# EAGLE board M_3x4._v6 (EAGLE 9.6.2)
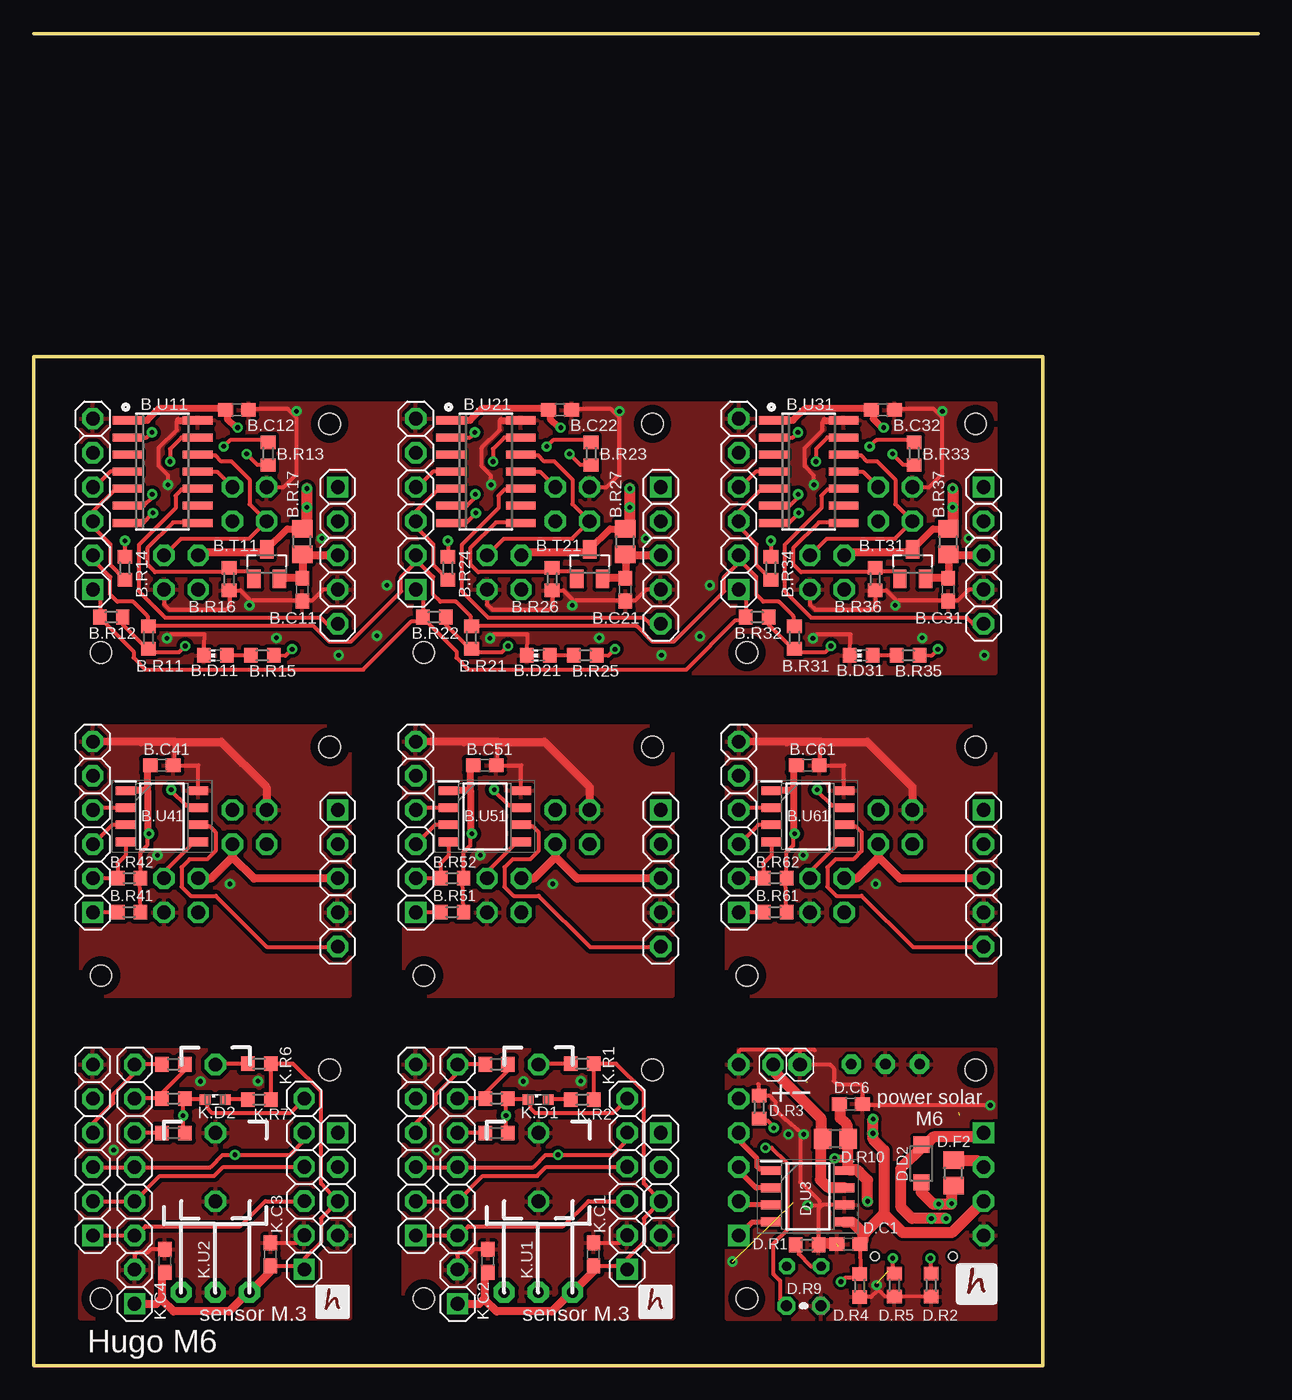
[diagram p0: board, top side]
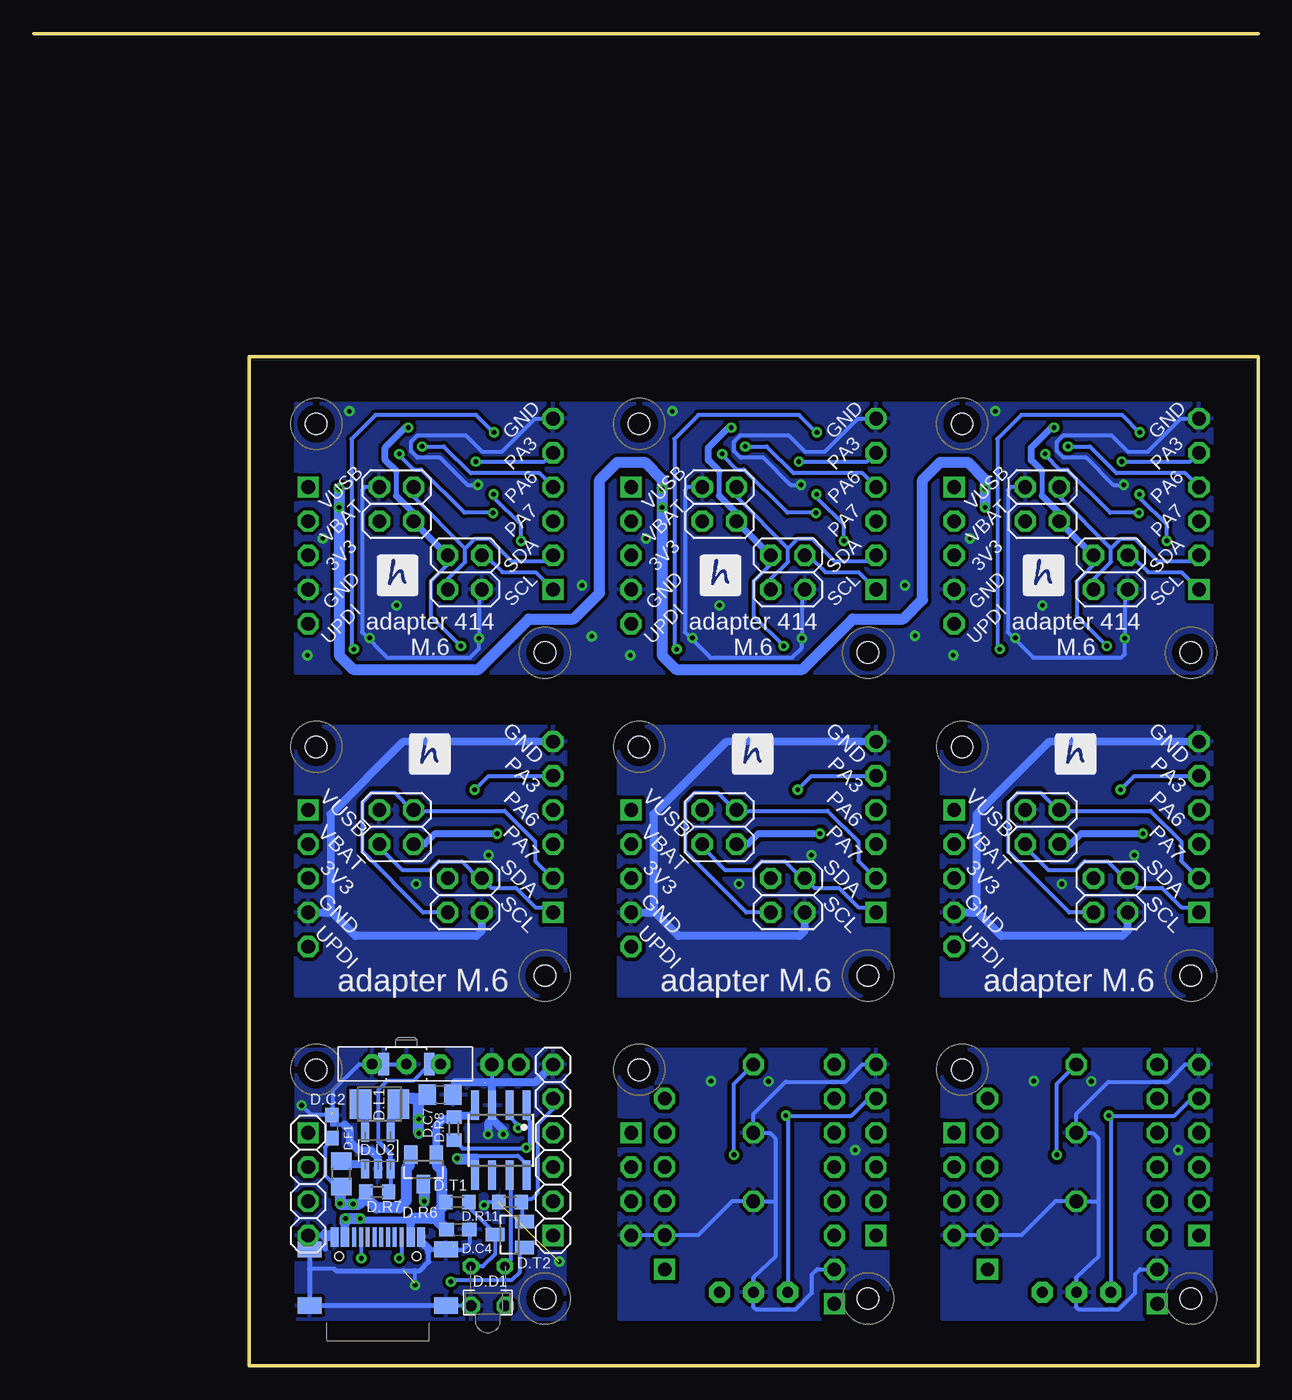
[diagram p1: board, bottom side, seen from below]

Size 91 x 99 mm. Coordinates in mm from the lower left corner, seen from the top.
Outline: 91,99 0,99
Outline: 0,0 75,0 75,75 0,75 0,0
Copper layers (1*16): Top 0.035mm / dielectric 1.5mm / Bottom 0.035mm
Design rules "default *": minimum track width 10mil, minimum drill 0.35mm, track to track 6mil, track to pad 6mil, pad to pad 6mil, via to via 6mil, smd to smd 6mil, copper to edge 0mil, drill to drill 15mil, minimum pad ring 10mil, minimum via ring 8mil, stop-mask expansion 4mil, vias tented up to drill 14mil, thermal gap 10mil
Holes 1.6 mm at 5,53 22,70 29,53 46,70 53,53 70,70 22,22 5,5 46,22 29,5 5,29 22,46 29,29 46,46 53,29 70,46 53,5 70,22
tRestrict: area 21,69 to 23,71; area 4,52 to 6,54; area 45,69 to 47,71; area 28,52 to 30,54; area 69,69 to 71,71; area 52,52 to 54,54; area 21,21 to 23,23; area 4,4 to 6,6; area 45,21 to 47,23; area 28,4 to 30,6; area 21,45 to 23,47; area 4,28 to 6,30; 6 more areas
bRestrict: area 21,69 to 23,71; area 4,52 to 6,54; area 45,69 to 47,71; area 28,52 to 30,54; area 69,69 to 71,71; area 52,52 to 54,54; area 4,4 to 6,6; area 21,21 to 23,23; area 28,4 to 30,6; area 45,21 to 47,23; area 21,45 to 23,47; area 4,28 to 6,30; 6 more areas

## Footprints (pad centres in the part's own frame; a part is rotated, then mirrored left to right if it is on the bottom)
C0603 = smd 1.1 x 1: 1 -0.85,0; 2 0.85,0
CHIP-LED0603 = smd 1.1 x 1: A1 0,-0.85; C1 0,0.85
1X05 = drill 1.016 pad 1.575 square: 1 -5.08,0 | drill 1.016 pad 1.575 octagon: 2 -2.54,0; 3 0,0; 4 2.54,0; 5 5.08,0
1X06 = drill 1.016 pad 1.575 square: 1 -6.35,0 | drill 1.016 pad 1.575 octagon: 2 -3.81,0; 3 -1.27,0; 4 1.27,0; 5 3.81,0; 6 6.35,0
2X02 = drill 1.016 pad 1.575 octagon: 1 -1.27,-1.27; 2 -1.27,1.27; 3 1.27,-1.27; 4 1.27,1.27
R0603 = smd 1 x 1.1: 1 -0.85,0; 2 0.85,0
FUSE = smd 1.3 x 1.5: 1 -0.95,0; 2 0.95,0
SO23 = smd 1 x 1.4: D 0,1.1; G -0.95,-1.1; S 0.95,-1.1
SO14 = smd 0.6 x 2.2: 1 -3.81,-2.6; 2 -2.54,-2.6; 3 -1.27,-2.6; 4 0,-2.6; 5 1.27,-2.6; 6 2.54,-2.6; 7 3.81,-2.6; 8 3.81,2.6; 9 2.54,2.6; 10 1.27,2.6; 11 0,2.6; 12 -1.27,2.6; 13 -2.54,2.6; 14 -3.81,2.6
SOIC127P600X175-8N = smd 1.5 x 0.65: 1 -2.7,1.905; 2 -2.7,0.635; 3 -2.7,-0.635; 4 -2.7,-1.905; 5 2.7,-1.905; 6 2.7,-0.635; 7 2.7,0.635; 8 2.7,1.905
C0805 = smd 1.3 x 1.5: 1 -0.95,0; 2 0.95,0
LED_1.8 = drill 0.7 octagon: 1 -1.27,-0.4; 2 1.27,-0.4
SHOTKY_2.8 = smd 1.2 x 1.2: A -1.4,0; K 1.4,0
R0805 = smd 1.3 x 1.5: 1 -0.95,0; 2 0.95,0
1X04 = drill 1.016 pad 1.575 square: 1 -3.81,0 | drill 1.016 pad 1.575 octagon: 2 -1.27,0; 3 1.27,0; 4 3.81,0
L3230M = smd 1.6 x 2.2: 1 -1.4,0; 2 1.4,0
1X02-2 = drill 1.016 pad 1.676 octagon: 1 -1,0 | drill 1.016 pad 1.575 octagon: 2 1,0
SWITCH = drill 0.8 pad 1.422 octagon: P$1 -2.54,0; P$2 0,0; P$3 2.54,0 | smd 0.8 x 1.7: P$4 -1.7,0; P$5 1.7,0
THERM = drill 0.813 octagon: 1 -1.27,0; 2 1.27,0
SOT32-5 = smd 0.6 x 1.4: BP 0.95,1.35; GND 0,-1.35; SHDN 0.95,-1.35; VIN -0.95,-1.35; VOUT -0.95,1.35
SOIC127P600X175-8N' = smd 1.528 x 0.65: 1 -2.711,1.905; 2 -2.711,0.635; 3 -2.711,-0.635; 4 -2.711,-1.905; 5 2.711,-1.905; 6 2.711,-0.635; 7 2.711,0.635; 8 2.711,1.905
1X08 = drill 1.016 pad 1.575 square: 1 -8.89,0 | drill 1.016 pad 1.575 octagon: 2 -6.35,0; 3 -3.81,0; 4 -1.27,0; 5 1.27,0; 6 3.81,0; 7 6.35,0; 8 8.89,0
SML0603 = smd 0.8 x 0.8: A 0.75,0; C -0.75,0
IR_RECEIVER = drill 0.8 pad 1.575 octagon: GND 0,0; OUT -2.54,0; VCC 2.54,0
BUTTON-SWITCH = drill 1.016 pad 1.575 octagon: P$1 0,0; P$2 5.08,0; P$3 10.16,0
USB-C = smd 0.6 x 1.45: A1B12 -3.235,3.825; A4B9 -2.46,3.825; B1A12 3.215,3.825; B4A9 2.44,3.825 | smd 0.3 x 1.45: A5 -1.26,3.825; A6 -0.26,3.825; A7 0.24,3.825; A8 1.24,3.825; B5 1.74,3.825; B6 0.74,3.825; B7 -0.76,3.825; B8 -1.76,3.825 | smd 1.8 x 1.2: SH1 -5.08,2.91; SH2 -5.08,-1.27; SH3 5.06,-1.27; SH4 5.06,2.91 | hole 0.65: 2.88,2.38; -2.9,2.38
SOP8 = smd 0.6 x 2.2: 1 -1.905,-2.6; 2 -0.635,-2.6; 3 0.635,-2.6; 4 1.905,-2.6; 5 1.905,2.6; 6 0.635,2.6; 7 -0.635,2.6; 8 -1.905,2.6

## Placement (x,y rotation side)
B.C11  100n  [C0603]  19.97,57.68 270 top
B.C12  100n  [C0603]  15.12,71.04 0 top
B.C21  100n  [C0603]  43.97,57.68 270 top
B.C22  100n  [C0603]  39.12,71.04 0 top
B.C31  100n  [C0603]  67.97,57.68 270 top
B.C32  100n  [C0603]  63.12,71.04 0 top
B.C41  100n  [C0603]  9.53,44.63 0 top
B.C51  100n  [C0603]  33.53,44.63 0 top
B.C61  100n  [C0603]  57.53,44.63 0 top
B.D11  [CHIP-LED0603]  13.5,52.8 90 top
B.D21  [CHIP-LED0603]  37.5,52.8 90 top
B.D31  [CHIP-LED0603]  61.5,52.8 90 top
B.J1  [1X05]  22.6,60.23 270 top
B.J2  [1X06]  4.4,64.04 90 top
B.J3  [2X02]  10.96,58.96 270 bottom
B.J4  [2X02]  16.04,64.04 270 bottom
B.J5  [1X06]  28.4,64.04 90 top
B.J6  [2X02]  34.96,58.96 270 bottom
B.J7  [2X02]  40.04,64.04 270 bottom
B.J8  [1X05]  46.6,60.23 270 top
B.J9  [1X06]  52.4,64.04 90 top
B.J10  [2X02]  58.96,58.96 270 bottom
B.J11  [2X02]  64.04,64.04 270 bottom
B.J12  [1X05]  70.6,60.23 270 top
B.J13  [1X06]  4.4,40.04 90 top
B.J14  [2X02]  16.04,40.04 270 bottom
B.J15  [1X05]  22.6,36.23 270 top
B.J16  [1X06]  28.4,40.04 90 top
B.J17  [2X02]  40.04,40.04 270 bottom
B.J18  [1X05]  46.6,36.23 270 top
B.J19  [1X06]  52.4,40.04 90 top
B.J20  [2X02]  64.04,40.04 270 bottom
B.J21  [1X05]  70.6,36.23 270 top
B.R11  2k2  [R0603]  8.54,54.12 270 top
B.R12  2k2  [R0603]  5.77,55.65 0 top
B.R13  alt RX 0R  [R0603]  17.43,67.79 270 top
B.R14  alt TX 0R  [R0603]  6.78,59.28 90 top
B.R15  1k  [R0603]  17,52.8 0 top
B.R16  100k  [R0603]  14.53,58.47 270 top
B.R17  alt fuse or 0R  [FUSE]  19.97,61.25 90 top
B.R21  2k2  [R0603]  32.54,54.12 270 top
B.R22  2k2  [R0603]  29.77,55.65 0 top
B.R23  alt RX 0R  [R0603]  41.43,67.79 270 top
B.R24  alt TX 0R  [R0603]  30.78,59.28 90 top
B.R25  1k  [R0603]  41,52.8 0 top
B.R26  100k  [R0603]  38.53,58.47 270 top
B.R27  alt fuse or 0R  [FUSE]  43.97,61.25 90 top
B.R31  2k2  [R0603]  56.54,54.12 270 top
B.R32  2k2  [R0603]  53.77,55.65 0 top
B.R33  alt RX 0R  [R0603]  65.43,67.79 270 top
B.R34  alt TX 0R  [R0603]  54.78,59.28 90 top
B.R35  1k  [R0603]  65,52.8 0 top
B.R36  100k  [R0603]  62.53,58.47 270 top
B.R37  alt fuse or 0R  [FUSE]  67.97,61.25 90 top
B.R41  alt 2k2 for master  [R0603]  7.1,33.72 0 top
B.R42  alt 2k2 for master  [R0603]  7.1,36.24 0 top
B.R51  alt 2k2 for master  [R0603]  31.1,33.72 0 top
B.R52  alt 2k2 for master  [R0603]  31.1,36.24 0 top
B.R61  alt 2k2 for master  [R0603]  55.1,33.72 0 top
B.R62  alt 2k2 for master  [R0603]  55.1,36.24 0 top
B.T11  NX3008  [SO23]  17.33,59.59 0 top
B.T21  NX3008  [SO23]  41.33,59.59 0 top
B.T31  NX3008  [SO23]  65.33,59.59 0 top
B.U11  AT414  [SO14]  9.59,66.45 270 top
B.U21  AT414  [SO14]  33.59,66.45 270 top
B.U31  AT414  [SO14]  57.59,66.45 270 top
B.U41  AT412  [SOIC127P600X175-8N]  9.53,40.84 0 top
B.U51  AT412  [SOIC127P600X175-8N]  33.53,40.84 0 top
B.U61  AT412  [SOIC127P600X175-8N]  57.53,40.84 0 top
D.C1  100n  [C0603]  60.55,9.05 0 top
D.C2  4u7  [C0603]  68.83,17.78 270 bottom
D.C4  4u7  [C0603]  59.47,10.13 180 bottom
D.C6  4u7  [C0603]  60.73,19.46 180 top
D.C7  10u  [C0805]  60.79,20.15 180 bottom
D.D1  LED_1.8  [LED_1.8]  57.25,7 180 bottom
D.D2  SHOTKY_2.8  [SHOTKY_2.8]  65.96,15.04 270 top
D.F1  0.5A  [R0805]  68.13,14.26 90 bottom
D.F2  1.1A  [R0805]  68.36,14.33 90 top
D.J2  [1X06]  52.4,16.04 90 bottom
D.J3  [1X04]  70.6,13.5 270 bottom
D.L1  2u2  [L3230M]  65.3,19.46 0 bottom
D.LIPOL  [1X02-2]  55.95,22.39 180 top
D.ON/OFF/RESET  SWITCH  [SWITCH]  63.3,22.42 0 bottom
D.R1  4k7  [R0603]  57.48,8.99 180 top
D.R2  5k1  [R0603]  66.7,6 270 top
D.R3  I=1800/R (10k for 0.2A, 3k3 for 0.55A, 3k9 for 0.46A)  [R0603]  53.91,19.23 270 top
D.R4  100k  [R0603]  61.39,5.97 270 top
D.R5  5k1  [R0603]  63.96,6 270 top
D.R6  3k3  [R0603]  59.51,12.17 180 bottom
D.R7  390k  [R0603]  65.47,12.93 0 bottom
D.R8  10k?  [R0603]  59.76,17.63 90 bottom
D.R9  TERM_10K  [THERM]  57.22,4.46 180 top
D.R10  0.1  [R0805]  59.58,16.87 180 top
D.R11  100k  [R0603]  55.6,12.17 180 bottom
D.T1  FDV304  [SO23]  62.03,14.61 180 bottom
D.T2  NX3008  [SO23]  55.62,9.76 90 bottom
D.U2  LM3671_3.3  [SOT32-5]  65.41,16 0 bottom
D.U3  INA219AIDR  [SOIC127P600X175-8N']  57.53,12.6 0 top
I.J1  [1X04]  22.6,13.5 270 top
I.J3  [1X04]  46.6,13.5 270 top
JB1  [2X02]  34.96,34.96 270 bottom
JB2  [2X02]  58.96,34.96 270 bottom
JB3  [2X02]  10.96,34.96 270 bottom
JP1  [1X06]  44.11,13.52 90 top
JP2  [1X06]  28.4,16.04 90 top
JP3  [1X08]  31.5,13.5 90 top
JP4  [1X06]  4.4,16.04 90 top
JP5  [1X08]  7.5,13.5 90 top
JP6  [1X06]  20.11,13.52 90 top
K.C1  [C0603]  41.61,8.28 90 top
K.C2  [C0603]  33.76,7.8 90 top
K.C3  [C0603]  17.61,8.28 90 top
K.C4  [C0603]  9.76,7.8 90 top
K.D1  [SML0603]  37.5,19.79 0 top
K.D2  [SML0603]  13.5,19.79 0 top
K.R1  100K  [R0603]  40.77,22.46 180 top
K.R2  180R  [R0603]  40.77,19.79 180 top
K.R3  0R  [R0603]  34.4,19.87 180 top
K.R4  0R  [R0603]  34.4,17.3 180 top
K.R5  0R  [R0603]  34.4,22.41 0 top
K.R6  100K  [R0603]  16.77,22.46 180 top
K.R7  180R  [R0603]  16.77,19.79 180 top
K.R8  0R  [R0603]  10.4,19.87 180 top
K.R9  0R  [R0603]  10.4,17.3 180 top
K.R10  0R  [R0603]  10.4,22.41 0 top
K.U1  VS1838B  [IR_RECEIVER]  37.5,5.46 0 top
K.U2  VS1838B  [IR_RECEIVER]  13.5,5.46 0 top
U$1  BUTTON-SWITCH  [BUTTON-SWITCH]  13.52,12.23 90 top
U$2  BUTTON-SWITCH  [BUTTON-SWITCH]  37.52,12.23 90 top
U$3  USB-C  [USB-C]  65.41,5.75 0 bottom
U$4  CN3083  [SOP8]  56.28,16.77 180 bottom

## Library data of the parts
B.C11 B.C12 B.C21 B.C22 B.C31 B.C32 B.C41 B.C51 B.C61 D.C1 D.C2 D.C4 D.C6 D.C7 K.C1-K.C4 = rcl; SPICEPREFIX: C
B.D11 B.D21 B.D31 K.D1 K.D2 = led
B.J1-B.J21 D.J2 D.J3 D.LIPOL I.J1 I.J3 JB1-JB3 JP1-JP6 = pinhead2
B.R11-B.R16 B.R21-B.R26 B.R31-B.R36 B.R41 B.R42 B.R51 B.R52 B.R61 B.R62 D.F1 D.F2 D.R1-D.R8 D.R10 D.R11 K.R1-K.R10 = rcl; SPICEPREFIX: R
B.R17 B.R27 B.R37 B.T11 B.T21 B.T31 D.D1 D.D2 D.ON/OFF/RESET D.R9 D.T1 D.T2 K.U1 K.U2 U$1-U$4 = hugo
B.U11 B.U21 B.U31 = atmel
B.U41 B.U51 B.U61 = ATTINY412-SSN; DESCRIPTION: 8-bit Microcontrollers - MCU 20MHz, 4KB, SOIC8, Ind 105C, Green, Tube; HEIGHT: 1.75mm; MANUFACTURER_NAME: Microchip; MANUFACTURER_PART_NUMBER: ATTINY412-SSN; MOUSER_PART_NUMBER: 579-ATTINY412-SSN; MOUSER_PRICE-STOCK: https://www.mouser.co.uk/ProductDetail/Microchip-Technology/ATTINY412-SSN?qs=3HJ2avRr9PItQG9ZsCamPQ%3D%3D
D.L1 = rcl; SPICEPREFIX: L
D.U2 = !stavebnice03
D.U3 = SamacSys_Parts; DESCRIPTION: 26-V, Bidirectional, Zero-Drift, High-Side, I2C Out Current/Power Monitor; HEIGHT: 1.75mm; MANUFACTURER_NAME: Texas Instruments; MANUFACTURER_PART_NUMBER: INA219AIDR; MOUSER_PART_NUMBER: 595-INA219AIDR; MOUSER_PRICE-STOCK: https://www.mouser.co.uk/ProductDetail/Texas-Instruments/INA219AIDR?qs=XGzIaZb%2FFYIE5YcOHTnKDA%3D%3D

## Nets
3V1: B.C51.1 B.J17.4 B.J18.3 B.R51.2 B.R52.2 B.U51.1 JB1.1
3V2: B.C61.1 B.J20.4 B.J21.3 B.R61.2 B.R62.2 B.U61.1 JB2.1
3V3: B.C41.1 B.J14.4 B.J15.3 B.R41.2 B.R42.2 B.U41.1 JB3.1
GND: B.C11.2 B.C12.2 B.C21.2 B.C22.2 B.C31.2 B.C32.2 B.D11.C1 B.D21.C1 B.D31.C1 B.J1.4 B.J2.6 B.J3.4 B.J4.1 B.J5.6 B.J6.4 B.J7.1 B.J8.4 B.J9.6 B.J10.4 B.J11.1 B.J12.4 B.R16.2 B.R26.2 B.R36.2 B.U11.14 B.U21.14 B.U31.14
GND1: I.J3.4 JP1.2 JP2.6 JP3.2 K.C1.2 K.C2.2 K.U1.GND U$2.P$1 U$2.P$2
GND2: B.C41.2 B.J13.6 B.J14.1 B.J15.4 B.U41.8 JB3.4
GND3: B.C51.2 B.J16.6 B.J17.1 B.J18.4 B.U51.8 JB1.4
GND4: I.J1.4 JP4.6 JP5.2 JP6.2 K.C3.2 K.C4.2 K.U2.GND U$1.P$1 U$1.P$2
GND5: D.C1.1 D.C2.1 D.C4.1 D.C6.1 D.C7.1 D.J2.6 D.J3.4 D.LIPOL.1 D.ON/OFF/RESET.P$1 D.ON/OFF/RESET.P$2 D.ON/OFF/RESET.P$4 D.R1.1 D.R2.2 D.R3.1 D.R4.2 D.R5.2 D.R9.1 D.R11.2 D.U2.GND D.U3.6 U$3.A1B12 U$3.B1A12 U$3.SH1 U$3.SH2 U$3.SH3 U$3.SH4 U$4.3
GND6: B.C61.2 B.J19.6 B.J20.1 B.J21.4 B.U61.8 JB2.4
IN+: D.LIPOL.2 D.R10.2 D.U3.7
IN-: D.C6.2 D.R10.1 D.T1.D D.U3.8 U$4.5 U$4.8
N$1: B.R14.2 B.U11.6
N$2: B.R13.2 B.U11.7
N$3: B.R16.1 B.T11.G B.U11.8
N$4: B.C11.1 B.J1.3 B.R17.1 B.T11.S
N$5: B.R15.2 B.U11.2
N$6: B.R26.1 B.T21.G B.U21.8
N$7: B.C21.1 B.J8.3 B.R27.1 B.T21.S
N$8: B.R25.2 B.U21.2
N$9: B.R24.2 B.U21.6
N$10: B.R23.2 B.U21.7
N$11: B.R36.1 B.T31.G B.U31.8
N$12: B.C31.1 B.J12.3 B.R37.1 B.T31.S
N$13: B.R35.2 B.U31.2
N$14: B.R34.2 B.U31.6
N$15: B.R33.2 B.U31.7
N$16: JP1.4 JP2.2 JP3.4
N$17: JP1.3 JP2.1 JP3.3
N$18: K.D1.A K.R2.2
N$19: JP1.6 JP2.5 K.D1.C K.R3.1 K.R4.1 K.U1.OUT
N$20: JP1.5 JP2.3 JP3.5 K.R1.2 U$2.P$3
N$21: JP2.4 JP3.8 K.R5.1
N$22: JP3.6 K.R4.2
N$24: JP3.7 K.R3.2 K.R5.2
N$25: JP4.2 JP5.4 JP6.4
N$27: JP4.1 JP5.3 JP6.3
N$28: K.D2.A K.R7.2
N$29: JP4.5 JP6.6 K.D2.C K.R8.1 K.R9.1 K.U2.OUT
N$30: JP4.3 JP5.5 JP6.5 K.R6.2 U$1.P$3
N$31: JP4.4 JP5.8 K.R10.1
N$32: JP5.6 K.R9.2
N$33: JP5.7 K.R8.2 K.R10.2
N$34: D.L1.1 D.U2.VOUT
N$35: D.ON/OFF/RESET.P$3 D.ON/OFF/RESET.P$5 D.R7.2 D.U2.SHDN
N$36: D.R5.1 U$3.B5
N$37: D.R2.1 U$3.A5
N$38: D.R3.2 U$4.2
N$39: D.J2.5 D.R11.1 D.T2.S
N$40: D.D1.1 U$4.7
N$41: D.R8.1 D.R9.2 U$4.1
N$42: D.F1.2 D.U2.VIN
PA1: B.D11.A1 B.R15.1
PA2: B.J5.5 B.U21.13
PA3: B.J2.5 B.U11.13
PA4: B.J5.4 B.R23.1 B.U21.4
PA5: B.J5.3 B.R24.1 B.U21.5
PA6: B.J2.4 B.R13.1 B.U11.4
PA7: B.J2.3 B.R14.1 B.U11.5
PA8: B.D21.A1 B.R25.1
PA9: B.J9.5 B.U31.13
PA10: B.J9.4 B.R33.1 B.U31.4
PA11: B.J9.3 B.R34.1 B.U31.5
PA12: B.D31.A1 B.R35.1
PA13: B.J13.5 B.U41.7
PA14: B.J13.4 B.U41.2
PA15: B.J13.3 B.U41.3
PA16: B.J16.5 B.U51.7
PA17: B.J16.4 B.U51.2
PA18: B.J16.3 B.U51.3
PA19: D.J2.4 D.U3.1
PA20: D.J2.3 D.U3.2
PA21: D.D1.2 D.R1.2 D.R6.1 D.T2.D
PA22: B.J19.5 B.U61.7
PA23: B.J19.4 B.U61.2
PA24: B.J19.3 B.U61.3
SCL: B.J2.1 B.J3.2 B.J4.3 B.J5.1 B.J6.2 B.J7.3 B.J9.1 B.J10.2 B.J11.3 B.R12.1 B.R22.1 B.R32.1 B.U11.12 B.U21.12 B.U31.12
SCL1: B.J13.1 B.J14.3 B.R41.1 B.U41.5 JB3.2
SCL2: B.J16.1 B.J17.3 B.R51.1 B.U51.5 JB1.2
SCL3: D.J2.1 D.U3.4
SCL4: B.J19.1 B.J20.3 B.R61.1 B.U61.5 JB2.2
SDA: B.J2.2 B.J3.3 B.J4.2 B.J5.2 B.J6.3 B.J7.2 B.J9.2 B.J10.3 B.J11.2 B.R11.1 B.R21.1 B.R31.1 B.U11.11 B.U21.11 B.U31.11
SDA1: B.J13.2 B.J14.2 B.R42.1 B.U41.4 JB3.3
SDA2: B.J16.2 B.J17.2 B.R52.1 B.U51.4 JB1.3
SDA3: D.J2.2 D.U3.3
SDA4: B.J19.2 B.J20.2 B.R62.1 B.U61.4 JB2.3
UPDI: B.J1.5 B.U11.10
UPDI1: B.J8.5 B.U21.10
UPDI2: B.J12.5 B.U31.10
UPDI3: B.J15.5 B.U41.6
UPDI4: B.J18.5 B.U51.6
UPDI5: B.J21.5 B.U61.6
VBAT: B.J1.2
VBAT1: B.J8.2
VBAT2: B.J12.2
VBATF: D.F2.2 D.J3.2
VCC: B.C12.1 B.C22.1 B.C32.1 B.J3.1 B.J4.4 B.J6.1 B.J7.4 B.J10.1 B.J11.4 B.R11.2 B.R12.2 B.R17.2 B.R21.2 B.R22.2 B.R27.2 B.R31.2 B.R32.2 B.R37.2 B.T11.D B.T21.D B.T31.D B.U11.1 B.U21.1 B.U31.1
VCC1: I.J3.3 JP1.1 JP3.1 K.C1.1 K.C2.1 K.R1.1 K.R2.1 K.U1.VCC
VCC2: I.J1.3 JP5.1 JP6.1 K.C3.1 K.C4.1 K.R6.1 K.R7.1 K.U2.VCC
VCC3: D.C1.2 D.C7.2 D.J3.3 D.L1.2 D.R4.1 D.T2.G D.U2.BP D.U3.5
VMOT: D.C2.2 D.D2.K D.F1.1 D.F2.1 D.R7.1 D.T1.S
VUSB: B.J1.1
VUSB1: B.J8.1
VUSB2: B.J12.1
VUSB3: D.C4.2 D.D2.A D.J3.1 D.R6.2 D.R8.2 D.T1.G U$3.A4B9 U$3.B4A9 U$4.4

## Tracks (layer width: path | path; a pad name or v marks a point on that pad's centre or on a via)
3V1  (via drill 0.35)
  Top 0.305: B.U51.1 32.45,42.75 | B.R51.2 31.88,36.18 B.R52.2 31.94,38.16 32.44,38.66 32.44,39.42 v32.56,39.55 | 38.8,37.83 38.8,38.17 38.77,38.2
  Top 0.508: B.C51.1 32.45,44.4 32.45,42.75 | v32.56,39.55 32.46,39.65 32.46,42.75 B.U51.1
  Top 0.61: B.J18.3 40.39,36.22 38.77,37.84 38.77,38.2 B.J17.4 | JB1.1 37.2,36.23 38.8,37.83
  Bottom 0.508: B.J17.4 37.93,38.77 37.15,39.55 v32.56,39.55
  Bottom 0.61: B.J18.3
3V2  (via drill 0.35)
  Top 0.305: B.U61.1 56.45,42.75 | B.R61.2 55.88,36.18 B.R62.2 55.94,38.16 56.44,38.66 56.44,39.42 v56.56,39.55 | 62.8,37.83 62.8,38.17 62.77,38.2
  Top 0.508: B.C61.1 56.45,44.4 56.45,42.75 | v56.56,39.55 56.46,39.65 56.46,42.75 B.U61.1
  Top 0.61: B.J21.3 64.39,36.22 62.77,37.84 62.77,38.2 B.J20.4 | JB2.1 61.2,36.23 62.8,37.83
  Bottom 0.508: B.J20.4 61.93,38.77 61.15,39.55 v56.56,39.55
  Bottom 0.61: B.J21.3
3V3  (via drill 0.35)
  Top 0.305: B.U41.1 8.45,42.75 | B.R41.2 7.88,36.18 B.R42.2 7.94,38.16 8.44,38.66 8.44,39.42 v8.56,39.55 | 14.8,37.83 14.8,38.17 14.77,38.2
  Top 0.508: B.C41.1 8.45,44.4 8.45,42.75 | v8.56,39.55 8.46,39.65 8.46,42.75 B.U41.1
  Top 0.61: B.J15.3 16.39,36.22 14.77,37.84 14.77,38.2 B.J14.4 | JB3.1 13.2,36.23 14.8,37.83
  Bottom 0.508: B.J14.4 13.93,38.77 13.15,39.55 v8.56,39.55
  Bottom 0.61: B.J15.3
GND  (via drill 0.35)
  Top 0.305: B.J3.4 9.69,56.59 10.09,56.19 14.3,56.19 14.55,56.45 14.55,57.6 B.R16.2 15.37,57.62 16.11,56.88 20.7,56.88 21.51,57.69 B.J1.4 | B.J4.1 18.58,65.31 19.49,66.22 19.49,70.51 18.89,71.12 16.04,71.12 B.C12.2 | v9.91,54.07 10.19,54.35 12.7,54.35 B.D11.C1 | 10.77,70.26 10.63,70.12 10.63,69.55 9.3,68.22 9.3,66.86 9.98,66.18 v9.98,65.48 | B.U11.14 | B.J6.4 33.69,56.59 34.09,56.19 38.3,56.19 38.55,56.45 38.55,57.6 B.R26.2 39.37,57.62 40.11,56.88 44.7,56.88 45.51,57.69 B.J8.4 | B.J7.1 42.58,65.31 43.49,66.22 43.49,70.51 42.89,71.12 40.04,71.12 B.C22.2 | v33.91,54.07 34.19,54.35 36.7,54.35 B.D21.C1 | 34.77,70.26 34.63,70.12 34.63,69.55 33.3,68.22 33.3,66.86 33.98,66.18 v33.98,65.48 | B.U21.14 | B.J10.4 57.69,56.59 58.09,56.19 62.3,56.19 62.55,56.45 62.55,57.6 B.R36.2 63.37,57.62 64.11,56.88 68.69,56.88 69.51,57.69 B.J12.4 | B.J11.1 66.58,65.31 67.49,66.22 67.49,70.51 66.89,71.12 64.04,71.12 B.C32.2 | v57.91,54.07 58.19,54.35 60.7,54.35 B.D31.C1 | 58.77,70.26 58.63,70.12 58.63,69.55 57.3,68.22 57.3,66.86 57.98,66.18 v57.98,65.48 | B.U31.14
  Top 0.508: 10.77,70.26 B.U11.14 | 34.77,70.26 B.U21.14 | 58.77,70.26 B.U31.14
  Bottom 0.305: B.J4.1 18.38,65.31 18.61,65.08 18.61,54.52 16.72,52.63 10.18,52.63 9.91,52.89 v9.91,54.07 9.91,57.47 B.J3.4 | B.J2.6 5.73,70.39 8.2,67.92 9.68,67.92 10.91,69.16 14.47,69.16 14.96,68.67 14.96,67.98 14.47,67.49 12.78,67.49 10.76,65.46 10,65.46 v9.98,65.48 | B.J7.1 42.38,65.31 42.6,65.08 42.6,54.52 40.72,52.63 34.63,52.63 33.91,53.35 v33.91,54.07 33.91,57.47 B.J6.4 | B.J5.6 29.73,70.39 32.2,67.92 33.68,67.92 34.91,69.16 38.47,69.16 38.96,68.67 38.96,67.98 38.47,67.49 36.78,67.49 34.76,65.46 34,65.46 v33.98,65.48 | B.J11.1 66.38,65.31 66.61,65.08 66.61,54.52 64.72,52.63 58.58,52.63 57.91,53.3 v57.91,54.07 57.91,57.47 B.J10.4 | B.J9.6 53.73,70.39 56.2,67.92 57.68,67.92 58.91,69.16 62.47,69.16 62.96,68.67 62.96,67.98 62.47,67.49 60.78,67.49 58.76,65.46 58,65.46 v57.98,65.48
  other vias: 19.54,70.94 16.03,56.51 18.04,54.1 22.66,52.8 21.41,61.49 43.54,70.94 40.03,56.51 42.04,54.1 46.66,52.8 45.5,61.49 67.54,70.94 64.03,56.51 66.04,54.1 70.66,52.8 69.5,61.49 26.25,58 50.25,58 49.52,54.22 25.5,54.25
  pour Bottom (isolate 0.254): 3.5,71.5 3.5,51.5 71.5,51.5 71.5,71.5
  pour Top (isolate 0.254): 3.5,71.5 3.5,51.5 71.5,51.5 71.5,71.5
GND1  (via drill 0.35)
  Top 0.305: K.C2.2 32.69,8.65 32.46,8.42 31.65,8.42 31.5,8.27 JP3.2 | K.C1.2 43.54,9.13 JP1.2
  Bottom 0.305: 35.89,12.2 35.89,16.9 36.3,17.31 U$2.P$2 37.52,18.72 35.12,21.12 30.69,21.12 29.42,22.39 JP2.6 | 35.89,12.2 35.89,8.09 37.52,6.57 37.52,5.48 | JP3.2 31.36,7.19 32.77,7.19 33.15,6.81 33.15,5.41 34.39,4.17 37.31,4.17 37.52,4.37 37.52,5.48 | 37.52,5.48 K.U1.GND 37.5,6.45 | 35.89,12.2 35.92,12.23 U$2.P$1 39.09,12.23 41.62,9.71 JP1.2 46.64,9.71 I.J3.4
  other vias: 36.4,21.14 40.67,21.16 29.95,16.03
  pour Top (isolate 0.305): 27.47,23.5 47.5,23.5 47.5,3.5 27.47,3.5
  pour Bottom (isolate 0.305): 27.5,23.5 47.5,23.5 47.5,3.5 27.5,3.5
GND2  (via drill 0.35)
  Top 0.305: 12.26,42.72 B.U41.8 12.23,44.63 B.C41.2 10.47,44.72 10.47,46.37
  Top 0.61: B.J13.6 7.98,46.35 8,46.37 10.47,46.37 13.95,46.37 17.31,43.01 B.J14.1
  Bottom 0.61: B.J13.6 15.56,46.35 20.94,40.98 20.94,33.84 21.14,33.64 | B.J15.4 22.55,33.64 21.14,33.64 | 21.14,33.64 20.79,33.64 19.08,31.94 10.11,31.94 9.69,32.36 JB3.4
  other vias: 9.2,37.95 14.58,35.81
  pour Bottom (isolate 0.305): 3.5,47.5 3.5,27.5 23.5,27.5 23.5,47.5
  pour Top (isolate 0.305): 3.5,47.5 3.5,27.5 23.5,27.5 23.5,47.5
GND3  (via drill 0.35)
  Top 0.305: 36.26,42.72 B.U51.8 36.23,44.63 B.C51.2 34.47,44.72 34.47,46.37
  Top 0.61: B.J16.6 31.98,46.35 32,46.37 34.47,46.37 37.95,46.37 41.31,43.01 B.J17.1
  Bottom 0.61: B.J16.6 39.56,46.35 44.94,40.98 44.94,33.84 45.14,33.64 | B.J18.4 46.55,33.64 45.14,33.64 | 45.14,33.64 44.79,33.64 43.08,31.94 34.1,31.94 33.69,32.36 JB1.4
  other vias: 33.2,37.95 38.58,35.81
  pour Bottom (isolate 0.305): 27.5,47.5 27.5,27.5 47.5,27.5 47.5,47.5
  pour Top (isolate 0.305): 27.5,47.5 27.5,27.5 47.5,27.5 47.5,47.5
GND4  (via drill 0.35)
  Top 0.305: K.C4.2 8.69,8.65 8.46,8.42 7.65,8.42 7.5,8.27 JP5.2 | K.C3.2 19.54,9.13 JP6.2
  Bottom 0.305: 11.89,12.2 11.89,16.9 12.3,17.31 U$1.P$2 13.52,18.72 11.12,21.12 6.69,21.12 5.42,22.39 JP4.6 | 11.89,12.2 11.89,8.09 13.52,6.57 13.52,5.48 | JP5.2 7.36,7.19 8.77,7.19 9.15,6.81 9.15,5.41 10.39,4.17 13.31,4.17 13.52,4.37 13.52,5.48 | 13.52,5.48 K.U2.GND 13.5,6.45 | 11.89,12.2 11.93,12.23 U$1.P$1 15.09,12.23 17.61,9.71 JP6.2 22.64,9.71 I.J1.4
  other vias: 12.4,21.14 16.67,21.16 5.95,16.03
  pour Top (isolate 0.305): 3.47,23.5 23.5,23.5 23.5,3.5 3.47,3.5
  pour Bottom (isolate 0.305): 3.5,23.5 23.5,23.5 23.5,3.5 3.5,3.5
GND5  (via drill 0.35)  (5 unrouted)
  Top 0.305: D.R2.2 66.7,5.17 D.R5.2 63.25,5.17 62.65,5.77 v62.65,6 62.65,5.54 62.23,5.12 D.R4.2 | D.C6.1 61.58,20 | 53.86,20.95 53.86,20.13 D.R3.1 | D.R3.1 54.14,19.86 | D.C6.1 61.69,19.36 v71.09,19.36 | D.U3.6 58.62,11.97 58.59,11.94 | 58.59,11.94 58.38,11.73 | 58.38,11.73 58.33,11.68 D.R1.1 | 58.38,11.73 58.38,12.26 56.98,13.66 56.98,17.37 v57.23,17.2 55.61,18.55 55.14,19.03 55.14,19.61 54.67,20.08 D.R3.1 | 56.87,23.51 52.53,23.51 52.4,23.37 D.J2.6 | 56.87,23.51 56.95,23.43 D.LIPOL.1 59.19,22.39 59.46,22.12 59.46,21.16 59.71,20.91 61.47,20.91 61.58,20.79 D.C6.1 | v57.53,11.94 58.59,11.94 | 56.87,23.51 58,23.51 58.04,23.47
  Top 0.61: D.J2.6 52.42,22.39
  Top 0.813: D.C1.1 58.42,9.1 D.R1.1
  Bottom 0.254: 57.15,20.97 57.03,21.08
  Bottom 0.305: 68.68,7.2 70.49,7.2 70.49,7.19 | 68.77,18.82 68.77,20.46 66.81,22.42 D.ON/OFF/RESET.P$1 | 62.65,6.13 v62.65,6 | v62.65,6 62.63,5.97 | D.ON/OFF/RESET.P$1 D.ON/OFF/RESET.P$2 | D.ON/OFF/RESET.P$4 D.ON/OFF/RESET.P$1 | v71.09,19.36 70.41,18.67 68.87,18.67 D.C2.1 68.83,17.93 67.91,17.93 | v62.65,6 62.65,7.07 | D.R9.1 60.33,4.46 U$3.SH3 | 60.45,8.71 60.4,8.66 60.33,8.59 59.13,8.59 58.62,9.1 D.C4.1 | D.R11.2 57.33,12.14 v57.53,11.94 | D.LIPOL.1 56.95,21.11 56.92,21.08
  Bottom 0.356: U$3.SH3 U$3.SH2 70.49,7.19 U$3.SH1 | 62.2,9.25 U$3.B1A12 | 68.68,7.2 68.55,7.07 62.65,7.07 | 63.52,7.07 62.29,7.07 61.65,7.71 61.65,8.45 61.75,8.55 61.65,8.65 61.62,8.68 | 61.63,8.64 61.61,8.66 60.4,8.66 | 60.45,8.71 60.4,8.71 U$3.SH4
  Bottom 0.406: 69.37,9.98 69.5,9.85 | 69.5,9.85 69.66,9.69 | U$3.A1B12 68.8,9.73 68.84,9.69 | 69.66,9.69 D.J3.4 70.6,8.77 | 69.66,9.69 69.31,9.69 | 69.5,9.85 69.34,9.68 69.34,8.71 | 66.14,15.99 66.21,16.06 66.89,16.06
  Bottom 0.61: D.U2.GND 65.41,15.49 65.91,15.99 66.14,15.99 | 61.63,8.64 61.65,8.65 | 61.62,8.68 62.2,9.25 | 59.81,8.84 60.17,8.84 U$3.SH4 60.22,8.79 | 70.6,8.77 U$3.SH1 | D.C7.1 59.69,20.15 59.69,21.07 57.51,21.07 | 56.92,21.08 53.71,21.08 D.J2.6 | 57.43,21.08 57.03,21.08 56.92,21.08 | U$3.B1A12 62.15,9.63 | 56.92,21.08 U$4.3 56.92,18.37 | 66.89,16.06 67.48,16.66 67.48,17.51 67.91,17.93 | 56.92,18.37 56.1,17.55 v56.1,17.2 | v57.23,17.2 57.23,18.07 56.92,18.37
  Bottom 0.813: 69.31,9.69 68.84,9.69
  other vias: 51.94,7.75
  pour Top (isolate 0.229): 51.5,23.5 51.5,3.5 71.5,3.5 71.5,23.5
  pour Bottom (isolate 0.254, rank 3): 51.5,23.5 71.5,23.5 71.5,3.5 51.5,3.5
GND6  (via drill 0.35)
  Top 0.305: 60.26,42.72 B.U61.8 60.23,44.63 B.C61.2 58.47,44.72 58.47,46.37
  Top 0.61: B.J19.6 55.98,46.35 56,46.37 58.47,46.37 61.95,46.37 65.31,43.01 B.J20.1
  Bottom 0.61: B.J19.6 63.56,46.35 68.94,40.98 68.94,33.84 69.14,33.64 | B.J21.4 70.55,33.64 69.14,33.64 | 69.14,33.64 68.79,33.64 67.08,31.94 58.1,31.94 57.69,32.36 JB2.4
  other vias: 57.2,37.95 62.58,35.81
  pour Bottom (isolate 0.305): 51.5,47.5 51.5,27.5 71.5,27.5 71.5,47.5
  pour Top (isolate 0.305): 51.5,47.5 51.5,27.5 71.5,27.5 71.5,47.5
IN+
  Top 0.813: D.LIPOL.2 54.95,21.95 58.5,18.4 58.5,17.38 58.62,17.25 D.R10.2 58.62,16.42 58.47,16.26 58.47,13.84 59.07,13.24 D.U3.7
IN-  (via drill 0.35)
  Top 0.305: 61.34,14.43 61.21,14.56 | 60.83,14.56 60.63,14.56 | 60.55,14.63 60.37,14.63 D.U3.8 60.39,14.66 60.39,15.42
  Top 0.61: v59.53,15.42 60.39,15.42
  Top 0.813: D.R10.1 60.42,16.98 60.42,17.93 59.93,18.42 59.93,19.41 D.C6.2 | D.R10.1 60.61,16.87 | v61.97,12.22 61.97,13.79 61.34,14.43 | D.R10.1 60.47,16.82 60.47,14.71 60.55,14.63 60.63,14.56 | 61.21,14.56 60.83,14.56
  Bottom 0.305: U$4.5 58.19,15.42 | 58.19,15.47 58.04,15.62 55.01,15.62 54.38,14.99 U$4.8
  Bottom 0.508: 58.29,15.37 58.19,15.47
  Bottom 0.61: 58.19,14.76 U$4.5 58.19,15.47
  Bottom 0.813: D.T1.D 61.97,13.45 v61.97,12.22 | v59.53,15.42 59.48,15.37 58.29,15.37
N$1  (via drill 0.35)
  Top 0.305: v6.79,61.31 B.R14.2 | v8.82,64.77 8.82,64.54 8.19,63.91 B.U11.6
  Bottom 0.305: v6.79,61.31 6.79,62.51 8.82,64.54 v8.82,64.77
N$2  (via drill 0.35)
  Top 0.305: B.U11.7 8.12,62.65 v8.86,63.38 | v15.83,67.76 16.65,66.94 B.R13.2
  Bottom 0.305: v8.86,63.38 8.88,63.4 10.99,63.4 14.21,66.62 14.76,66.62 15.83,67.69 v15.83,67.76
N$3
  Top 0.305: B.T11.G 16.38,59.01 14.84,59.01 B.R16.1 14.2,58.98 9.03,58.98 8.45,59.57 8.45,60.76 10.35,62.67 12.16,62.67 B.U11.8
N$4
  Top 0.305: B.C11.1 20.14,58.71 20.14,60.23
  Top 0.508: B.R17.1 B.C11.1
  Top 0.61: B.J1.3 20.14,60.23 | B.C11.1 18.28,58.53 B.T11.S
  Bottom 0.813: B.J1.3 22.6,60
N$5  (via drill 0.35)
  Top 0.305: v8.79,69.37 8.42,69 B.U11.2 | v19.2,53.26 18.7,52.76 B.R15.2
  Bottom 0.305: v8.79,69.37 8.82,69.37 10.11,70.66 17.61,70.66 19.38,68.88 19.38,53.41 19.23,53.26 v19.2,53.26
N$6
  Top 0.305: B.T21.G 40.38,59.01 38.84,59.01 B.R26.1 38.2,58.98 33.03,58.98 32.45,59.57 32.45,60.76 34.35,62.67 36.16,62.67 B.U21.8
N$7
  Top 0.305: B.C21.1 44.15,58.71 44.15,60.23
  Top 0.508: B.R27.1 B.C21.1
  Top 0.61: B.J8.3 44.15,60.23 | B.C21.1 42.28,58.53 B.T21.S
  Bottom 0.813: B.J8.3 46.6,60
N$8  (via drill 0.35)
  Top 0.305: v32.79,69.37 32.42,69 B.U21.2 | v43.2,53.26 42.7,52.76 B.R25.2
  Bottom 0.305: v32.79,69.37 32.82,69.37 34.11,70.66 41.6,70.66 43.38,68.88 43.38,53.41 43.23,53.26 v43.2,53.26
N$9  (via drill 0.35)
  Top 0.305: v30.79,61.31 B.R24.2 | v32.82,64.77 32.82,64.54 32.19,63.91 B.U21.6
  Bottom 0.305: v30.79,61.31 30.79,62.51 32.82,64.54 v32.82,64.77
N$10  (via drill 0.35)
  Top 0.305: B.U21.7 32.12,62.65 v32.86,63.38 | v39.83,67.76 40.65,66.94 B.R23.2
  Bottom 0.305: v32.86,63.38 32.88,63.4 34.99,63.4 38.21,66.62 38.76,66.62 39.83,67.69 v39.83,67.76
N$11
  Top 0.305: B.T31.G 64.38,59.01 62.84,59.01 B.R36.1 62.2,58.98 57.03,58.98 56.45,59.57 56.45,60.76 58.35,62.67 60.16,62.67 B.U31.8
N$12
  Top 0.305: B.C31.1 68.14,58.71 68.14,60.23
  Top 0.508: B.R37.1 B.C31.1
  Top 0.61: B.J12.3 68.14,60.23 | B.C31.1 66.28,58.53 B.T31.S
  Bottom 0.813: B.J12.3 70.6,60
N$13  (via drill 0.35)
  Top 0.305: v56.79,69.37 56.42,69 B.U31.2 | v67.2,53.26 66.7,52.76 B.R35.2
  Bottom 0.305: v56.79,69.37 56.82,69.37 58.11,70.66 65.61,70.66 67.38,68.88 67.38,53.41 67.23,53.26 v67.2,53.26
N$14  (via drill 0.35)
  Top 0.305: v54.78,61.31 B.R34.2 | v56.82,64.77 56.82,64.54 56.19,63.91 B.U31.6
  Bottom 0.305: v54.78,61.31 54.78,62.51 56.82,64.54 v56.82,64.77
N$15  (via drill 0.35)
  Top 0.305: B.U31.7 56.12,62.65 v56.86,63.38 | v63.83,67.76 64.65,66.94 B.R33.2
  Bottom 0.305: v56.86,63.38 56.88,63.4 58.99,63.4 62.21,66.62 62.76,66.62 63.83,67.69 v63.83,67.76
N$16
  Top 0.305: JP2.2 JP3.4 33.38,14.11 37.42,14.11 38.09,14.79 JP1.4
N$17
  Top 0.305: JP2.1 JP3.3 31.63,9.69 32.31,10.38 39.35,10.38 41.22,12.25 JP1.3
N$18
  Top 0.305: K.R2.2 K.D1.A
N$19  (via drill 0.35)
  Top 0.305: K.R3.1 35.37,19.76 | K.R3.1 35.33,19.79 K.D1.C 36.9,19.64 36.9,19.16 37.28,18.78 43.05,18.78 44.11,19.84 JP1.6 | K.R3.1 35.1,19.71 v35.1,18.6 35.1,17.4 K.R4.1
  Bottom 0.305: JP2.5 28.98,19.85 30.23,18.6 v35.1,18.6 34.96,18.45 K.U1.OUT
N$20  (via drill 0.35)
  Top 0.305: 39.88,22.41 K.R1.2 39.89,22.43 37.56,22.43 U$2.P$3 | JP2.3 JP3.5 | JP3.5 31.38,14.77 | JP3.5 37.14,14.77 38.05,15.68 v38.96,15.68 43.04,15.68 44.11,16.74 JP1.5
  Bottom 0.305: v38.96,15.68 38.99,15.7 38.99,20.92 U$2.P$3
N$21
  Top 0.305: JP2.4 28.35,17.98 29.92,19.54 29.92,20.19 31.5,21.77 JP3.8 31.52,22.41 K.R5.1
N$22
  Top 0.305: JP3.6 K.R4.2
N$24
  Top 0.305: JP3.7 31.52,19.87 K.R3.2 33.57,20.3 35.24,21.97 K.R5.2
N$25
  Top 0.305: JP4.2 JP5.4 9.38,14.11 13.42,14.11 14.09,14.79 JP6.4
N$27
  Top 0.305: JP4.1 JP5.3 7.63,9.69 8.31,10.38 15.35,10.38 17.22,12.25 JP6.3
N$28
  Top 0.305: K.R7.2 K.D2.A
N$29  (via drill 0.35)
  Top 0.305: K.R8.1 11.37,19.76 | K.R8.1 11.33,19.79 K.D2.C 12.9,19.64 12.9,19.16 13.28,18.78 19.05,18.78 20.11,19.84 JP6.6 | K.R8.1 11.1,19.71 v11.1,18.6 11.1,17.4 K.R9.1
  Bottom 0.305: JP4.5 4.98,19.85 6.23,18.6 v11.1,18.6 10.96,18.45 K.U2.OUT
N$30  (via drill 0.35)
  Top 0.305: 15.88,22.41 K.R6.2 15.89,22.43 13.56,22.43 U$1.P$3 | JP4.3 JP5.5 | JP5.5 7.38,14.77 | JP5.5 13.14,14.77 14.05,15.68 v14.96,15.68 19.04,15.68 20.11,16.74 JP6.5
  Bottom 0.305: v14.96,15.68 14.99,15.7 14.99,20.92 U$1.P$3
N$31
  Top 0.305: JP4.4 4.35,17.98 5.92,19.54 5.92,20.19 7.5,21.77 JP5.8 7.52,22.41 K.R10.1
N$32
  Top 0.305: JP5.6 K.R9.2
N$33
  Top 0.305: JP5.7 7.52,19.87 K.R8.2 9.57,20.3 11.24,21.97 K.R10.2
N$34
  Bottom 0.61: D.U2.VOUT 66.36,18.54 66.7,18.87 D.L1.1
N$35
  Bottom 0.305: 65.4,16.67 65.4,20.52 64.72,21.19 62.78,21.19 61.58,22.4 D.ON/OFF/RESET.P$5 D.ON/OFF/RESET.P$3 | D.U2.SHDN 64.47,13.09 D.R7.2
  Bottom 0.356: 64.44,14.63 D.U2.SHDN 64.47,15.73 65.4,16.67 | 64.44,13.11 D.R7.2
N$36  (via drill 0.35)
  Top 0.305: D.R5.1 63.84,6.98 v63.84,8
  Bottom 0.305: U$3.B5 63.67,8.17 v63.84,8
N$37  (via drill 0.35)
  Top 0.305: v66.65,8 66.65,6.95 D.R2.1
  Bottom 0.305: U$3.A5 66.67,8.03 v66.65,8
N$38  (via drill 0.35)
  Top 0.305: 54.04,18.38 D.R3.2 53.91,18.21 54.56,18.21 54.99,17.78 v54.99,17.68
  Bottom 0.305: U$4.2 55.65,18.53 55.07,17.95 55.07,17.75 v54.99,17.68
N$39
  Bottom 0.305: D.J2.5 52.4,19.11 53.57,17.94 53.57,12.83 53.97,12.42 54.58,12.42 54.58,11.98 54.75,12.14 D.R11.1 54.7,12.12 54.7,10.88 D.T2.S
N$40
  Bottom 0.305: U$4.7 55.57,14.09 55.57,7.8 D.D1.1
N$41  (via drill 0.35)
  Top 0.305: D.R9.2 55.47,4.94 55.47,6.33 54.99,6.82 54.99,9.1 56,10.11 56,15.05 54.84,16.21 v54.38,16.21
  Bottom 0.305: D.R8.1 59.14,16.16 54.44,16.16 v54.38,16.21 54.15,16.44 54.15,18.22 54.38,18.45 U$4.1
N$42
  Bottom 0.305: D.U2.VIN 66.36,14.88 66.5,15.01 | 67.93,15.01 D.F1.2
  Bottom 0.61: 67.93,15.01 66.5,15.01
  Bottom 0.813: D.F1.2 67.98,15.21
PA1
  Top 0.305: B.R15.1 B.D11.A1
PA2  (via drill 0.35)
  Top 0.305: B.U21.13 34.99,69 34.14,68.14 v34.14,67.2
  Bottom 0.305: B.J5.5 29.05,67.2 v34.14,67.2
PA3  (via drill 0.35)
  Top 0.305: B.U11.13 10.99,69 10.14,68.14 v10.14,67.2
  Bottom 0.305: B.J2.5 5.04,67.2 v10.14,67.2
PA4  (via drill 0.35)
  Top 0.305: B.U21.4 29.67,66.45 28.53,65.31 B.J5.4 | v38.12,68.32 38.59,68.79 41.27,68.79 B.R23.1
  Bottom 0.305: B.J5.4 29.42,66.33 34.53,66.33 36.52,68.32 v38.12,68.32
PA5
  Top 0.305: B.U21.5 30.97,65.2 30.13,65.2 28.4,63.47 B.J5.3 28.4,62.37 29.72,61.05 29.72,59.49 B.R24.1
PA6  (via drill 0.35)
  Top 0.305: B.U11.4 5.67,66.45 4.53,65.31 B.J2.4 | v14.12,68.32 14.59,68.79 17.27,68.79 B.R13.1
  Bottom 0.305: B.J2.4 5.42,66.33 10.53,66.33 12.53,68.32 v14.12,68.32
PA7
  Top 0.305: B.U11.5 6.97,65.2 6.13,65.2 4.4,63.47 B.J2.3 4.4,62.37 5.72,61.05 5.72,59.49 B.R14.1
PA8
  Top 0.305: B.R25.1 B.D21.A1
PA9  (via drill 0.35)
  Top 0.305: B.U31.13 58.99,69 58.14,68.14 v58.14,67.2
  Bottom 0.305: B.J9.5 53.05,67.2 v58.14,67.2
PA10  (via drill 0.35)
  Top 0.305: B.U31.4 53.67,66.45 52.53,65.31 B.J9.4 | v62.12,68.32 62.59,68.79 65.28,68.79 B.R33.1
  Bottom 0.305: B.J9.4 53.42,66.33 58.53,66.33 60.52,68.32 v62.12,68.32
PA11
  Top 0.305: B.U31.5 54.97,65.2 54.13,65.2 52.4,63.47 B.J9.3 52.4,62.37 53.72,61.05 53.72,59.49 B.R34.1
PA12
  Top 0.305: B.R35.1 B.D31.A1
PA13  (via drill 0.35)
  Top 0.305: B.U41.7 12.08,41.63 11.33,41.63 10.23,42.73 v10.23,42.81
  Bottom 0.305: v10.23,42.81 9.21,43.83 4.4,43.83 B.J13.5
PA14
  Top 0.305: B.J13.4 4.61,41.48 B.U41.2
PA15
  Top 0.305: B.J13.3 4.4,38.73 4.4,38.76 5.85,40.21 B.U41.3
PA16  (via drill 0.35)
  Top 0.305: B.U51.7 36.08,41.63 35.33,41.63 34.23,42.73 v34.23,42.81
  Bottom 0.305: v34.23,42.81 33.21,43.83 28.4,43.83 B.J16.5
PA17
  Top 0.305: B.J16.4 28.61,41.48 B.U51.2
PA18
  Top 0.305: B.J16.3 28.4,38.73 28.4,38.76 29.85,40.21 B.U51.3
PA19
  Top 0.356: D.U3.1 54.72,14.61 53.96,14.61 53.72,14.85 53.72,15.45 52.4,16.77 D.J2.4
PA20
  Top 0.305: D.J2.3 52.4,14.51
  Top 0.356: 52.4,14.51 53.69,13.22 54.8,13.22 D.U3.2
PA21
  Top 0.305: D.R1.2 56.86,8.77 56.86,8.32 57.78,7.4 D.D1.2
  Bottom 0.305: 58.66,12.05 D.R6.1 58.66,11.79 56.72,9.86 D.T2.D 56.72,8.3 57.62,7.4 D.D1.2
PA22  (via drill 0.35)
  Top 0.305: B.U61.7 60.08,41.63 59.33,41.63 58.23,42.73 v58.23,42.81
  Bottom 0.305: v58.23,42.81 57.21,43.83 52.4,43.83 B.J19.5
PA23
  Top 0.305: B.J19.4 52.61,41.48 B.U61.2
PA24
  Top 0.305: B.J19.3 52.4,38.73 52.4,38.76 53.85,40.21 B.U61.3
SCL
  Top 0.305: B.U11.12 12.27,67.65 13.51,67.65 13.94,67.22 14.7,67.22 16.04,65.88 16.04,64.03 B.J4.3 16.02,61.48 10.95,61.48 9.71,60.23 B.J3.2 | B.J2.1 4.93,57.16 4.93,55.66 B.R12.1 4.92,55.6 7.42,53.1 7.42,52.63 8.3,51.74 24.5,51.74 28.1,55.35 29.17,55.35 | B.U21.12 36.27,67.65 37.51,67.65 37.94,67.22 38.7,67.22 40.04,65.88 40.04,64.03 B.J7.3 40.02,61.48 34.95,61.48 33.71,60.23 B.J6.2 | B.J5.1 28.93,57.16 28.93,55.66 B.R22.1 28.92,55.6 29.17,55.35 | 29.17,55.35 31.42,53.1 31.42,52.63 32.3,51.74 48.5,51.74 52.17,55.41 52.93,55.41 52.93,55.66 | B.U31.12 60.27,67.65 61.51,67.65 61.94,67.22 62.7,67.22 64.04,65.88 64.04,64.03 B.J11.3 64.02,61.48 58.95,61.48 57.71,60.23 B.J10.2 | B.J9.1 52.93,57.16 52.93,55.66 | 52.93,55.66 B.R32.1 52.92,55.6
  Bottom 0.305: B.J2.1 5.7,58.98 8.17,58.98 9.41,60.23 B.J3.2 | B.J5.1 29.7,58.98 32.17,58.98 33.41,60.23 B.J6.2 | B.J9.1 53.7,58.98 56.17,58.98 57.41,60.23 B.J10.2
SCL1
  Top 0.305: B.U41.5 11.92,38.94 9.69,36.71 JB3.2 | B.R41.1 6.15,33.69 B.J13.1
  Bottom 0.305: B.J13.1 4.78,34.07 5.71,34.07 7.16,35.52 8.98,35.52 JB3.2 9.92,36.23 11.18,37.49 12.91,37.49 13.57,36.83 15.57,36.83 17.31,38.57 B.J14.3
SCL2
  Top 0.305: B.U51.5 35.92,38.94 33.69,36.71 JB1.2 | B.R51.1 30.15,33.69 B.J16.1
  Bottom 0.305: B.J16.1 28.78,34.07 29.71,34.07 31.16,35.52 32.98,35.52 JB1.2 33.92,36.23 35.18,37.49 36.91,37.49 37.57,36.83 39.57,36.83 41.31,38.57 B.J17.3
SCL3
  Top 0.356: D.U3.4 53.41,10.7 D.J2.1
SCL4
  Top 0.305: B.U61.5 59.92,38.94 57.69,36.71 JB2.2 | B.R61.1 54.15,33.69 B.J19.1
  Bottom 0.305: B.J19.1 52.78,34.07 53.71,34.07 55.16,35.52 56.98,35.52 JB2.2 57.92,36.23 59.18,37.49 60.91,37.49 61.57,36.83 63.57,36.83 65.31,38.57 B.J20.3
SDA
  Top 0.305: B.U11.11 13.62,66.45 B.J4.2 | B.J2.2 4.4,59.92 5.7,58.62 5.7,57.32 6.23,56.79 7.38,56.79 8.46,55.71 8.46,55.05 B.R11.1 20.82,54.97 21.95,53.84 23.6,53.84 27.31,57.55 27.31,58.6 28.4,59.7 28.4,59.92 | B.U21.11 37.62,66.45 B.J7.2 | 28.4,59.92 29.7,58.62 29.7,57.32 30.23,56.79 31.38,56.79 32.46,55.71 32.46,55.05 B.R21.1 44.82,54.97 45.95,53.84 47.6,53.84 51.31,57.55 51.31,58.6 52.4,59.7 B.J9.2 52.4,59.92 53.7,58.62 53.7,57.32 54.23,56.79 55.38,56.79 56.46,55.71 56.46,55.05 B.R31.1 | 28.4,59.92 B.J5.2 | B.U31.11 61.62,66.45 B.J11.2
  Bottom 0.305: 10.94,60.75 14.77,64.58 B.J4.2 | B.J2.2 4.6,60.23 5.04,59.8 7.47,59.8 9.15,61.48 10.21,61.48 10.94,60.75 | 10.94,60.75 10.94,59.75 12.23,58.45 B.J3.3 | 34.94,60.75 38.77,64.58 B.J7.2 | B.J5.2 28.6,60.23 29.04,59.8 31.48,59.8 33.15,61.48 34.21,61.48 34.94,60.75 | 34.94,60.75 34.94,59.75 36.23,58.45 B.J6.3 | 58.94,60.75 62.77,64.58 B.J11.2 | B.J9.2 52.6,60.23 53.03,59.8 55.48,59.8 57.15,61.48 58.21,61.48 58.94,60.75 | 58.94,60.75 58.94,59.75 60.23,58.45 B.J10.3
SDA1
  Top 0.305: B.J13.2 4.41,36.24 B.R42.1 6.23,37.32 6.83,37.92 B.U41.4
  Bottom 0.305: JB3.3 14.04,33.69 18.57,38.22 18.57,41.86 17.84,42.6 16.18,42.6 14.9,41.31 B.J14.2 14.71,41.25 8,41.25 5.72,38.97 5.72,37.54 4.41,36.23 B.J13.2
SDA2
  Top 0.305: B.J16.2 28.41,36.24 B.R52.1 30.23,37.32 30.83,37.92 B.U51.4
  Bottom 0.305: JB1.3 38.04,33.69 42.57,38.22 42.57,41.86 41.84,42.6 40.18,42.6 38.9,41.31 B.J17.2 38.71,41.25 32,41.25 29.72,38.97 29.72,37.54 28.41,36.23 B.J16.2
SDA3
  Top 0.305: 54.81,11.98 D.U3.3
  Top 0.356: D.U3.3 52.9,11.97 52.78,11.85 D.J2.2
SDA4
  Top 0.305: B.J19.2 52.41,36.24 B.R62.1 54.23,37.32 54.83,37.92 B.U61.4
  Bottom 0.305: JB2.3 62.04,33.69 66.57,38.22 66.57,41.86 65.83,42.6 64.18,42.6 62.9,41.31 B.J20.2 62.71,41.25 56,41.25 53.72,38.97 53.72,37.54 52.41,36.23 B.J19.2
UPDI
  Top 0.305: B.U11.10 12.13,65.13 11,65.13 10.54,64.67 10.54,63.73 7.81,61 7.81,57.58 9.81,55.58 21.36,55.58 21.79,55.15 B.J1.5
UPDI1
  Top 0.305: B.U21.10 36.13,65.13 35,65.13 34.54,64.67 34.54,63.73 31.81,61 31.81,57.58 33.81,55.58 45.35,55.58 45.79,55.15 B.J8.5
UPDI2
  Top 0.305: B.U31.10 60.13,65.13 59,65.13 58.54,64.67 58.54,63.73 55.81,61 55.81,57.58 57.81,55.58 69.36,55.58 69.79,55.15 B.J12.5
UPDI3
  Top 0.305: 12.2,40.18 B.U41.6 12.36,40.08 13.11,40.08 13.52,39.67 13.52,38.26 12.91,37.65 11.59,37.65 10.98,37.04 10.98,35.6 11.65,34.94 13.53,34.94 17.37,31.1 22.55,31.1 B.J15.5
UPDI4
  Top 0.305: 36.2,40.18 B.U51.6 36.36,40.08 37.1,40.08 37.52,39.67 37.52,38.26 36.91,37.65 35.59,37.65 34.98,37.04 34.98,35.6 35.65,34.94 37.53,34.94 41.37,31.1 46.55,31.1 B.J18.5
UPDI5
  Top 0.305: 60.2,40.18 B.U61.6 60.36,40.08 61.1,40.08 61.52,39.67 61.52,38.26 60.91,37.65 59.59,37.65 58.98,37.04 58.98,35.6 59.65,34.94 61.53,34.94 65.37,31.1 70.55,31.1 B.J21.5
VBATF
  Top 0.813: D.J3.2 70.12,15.25 68.39,15.25 D.F2.2
VCC  (via drill 0.35)
  Top 0.305: B.T11.D 17.07,60.43 | B.J3.1 12.43,60.43 | B.R12.2 6.62,55.29 6.64,55.27 6.64,55.07 8.44,53.27 B.R11.2 8.79,53.02 10.79,53.02 v11.26,53.49 | 20.02,62.25 B.R17.2 | B.T21.D 41.07,60.43 | B.J6.1 36.43,60.43 | B.R22.2 30.62,55.29 30.64,55.27 30.64,55.07 32.44,53.27 B.R21.2 32.79,53.02 34.79,53.02 v35.26,53.49 | 44.02,62.25 B.R27.2 | B.T31.D 65.07,60.43 | B.J10.1 60.43,60.43 | B.R32.2 54.62,55.29 54.64,55.27 54.64,55.07 56.44,53.27 B.R31.2 56.79,53.02 58.79,53.02 v59.26,53.49 | 68.02,62.25 B.R37.2
  Top 0.508: B.U11.1 8.44,70.27 9.3,71.12 14.18,71.12 B.C12.1 14.39,70.91 14.39,70.37 15.04,69.72 v15.16,69.72 | B.T11.D 18.84,62.2 B.R17.2 | B.U21.1 32.44,70.27 33.3,71.12 38.18,71.12 B.C22.1 38.39,70.91 38.39,70.37 39.04,69.72 v39.16,69.72 | B.T21.D 42.84,62.2 B.R27.2 | B.U31.1 56.44,70.27 57.3,71.12 62.18,71.12 B.C32.1 62.39,70.91 62.39,70.37 63.04,69.72 v63.16,69.72 | B.T31.D 66.84,62.2 B.R37.2
  Top 0.61: 17.07,60.43 12.43,60.43 | 41.07,60.43 36.43,60.43 | 65.07,60.43 60.43,60.43
  Top 0.813: B.R17.2 20.3,62.53 v20.3,65.2 | B.R27.2 44.3,62.53 v44.3,65.2 | B.R37.2 68.3,62.53 v68.3,65.2
  Bottom 0.305: v11.26,53.49 13.49,55.72 13.49,58.28 12.23,59.54 B.J3.1 | v35.26,53.49 37.49,55.72 37.49,58.28 36.23,59.54 B.J6.1 | v59.26,53.49 61.49,55.72 61.49,58.28 60.23,59.54 B.J10.1
  Bottom 0.356: 16.04,64.65 16.04,66.47 | 40.04,64.65 40.04,66.47 | 64.04,64.65 64.04,66.47
  Bottom 0.508: B.J3.1 12.26,60.23 14.77,62.74 B.J4.4 14.77,63.38 16.04,64.65 | 16.04,66.47 16.87,67.3 16.87,68.23 15.27,69.83 v15.16,69.72 | B.J6.1 36.26,60.23 38.77,62.74 B.J7.4 38.77,63.38 40.04,64.65 | 40.04,66.47 40.87,67.3 40.87,68.23 39.27,69.83 v39.16,69.72 | B.J10.1 60.26,60.23 62.77,62.74 B.J11.4 62.77,63.38 64.04,64.65 | 64.04,66.47 64.87,67.3 64.87,68.23 63.27,69.83 v63.16,69.72
  Bottom 0.813: v20.3,63.8 20.3,63.83 v20.3,65.2 20.3,65.87 21.58,67.16 23.62,67.16 24.95,65.83 24.95,56.94 26.37,55.51 30.13,55.51 33.88,51.76 43.26,51.76 44.3,52.8 v44.3,65.2 | v44.3,65.2 44.3,65.22 | v44.3,63.8 44.3,63.83 v44.3,65.2 | v68.3,65.2 68.3,65.22 | v68.3,65.2 68.3,52.8 67.26,51.76 57.93,51.76 54.18,55.51 50.87,55.51 48.95,57.44 48.95,65.83 47.62,67.16 45.58,67.16 44.3,65.87 v44.3,65.2 | v68.3,63.8 68.3,63.83 v68.3,65.2
VCC1
  Top 0.305: 41.62,22.05 K.R1.1 | K.R1.1 | K.R1.1 K.R2.1 | K.R1.1 43.28,22.46 45.35,20.38 45.35,13.55 I.J3.3 45.35,10.96 45.35,9.19 44.11,7.95 JP1.1 43.84,7.43 K.C1.1
  Top 0.61: JP3.1 33.12,4.61 33.55,5.05 | K.C2.1 33.55,6.75 33.55,5.05 | K.U1.VCC 39.94,5.46 38.52,4.04 34.41,4.04 33.56,4.88 33.56,5.04 33.55,5.05 | K.U1.VCC 40.04,5.59 | K.U1.VCC 41.61,7.03 K.C1.1
VCC2
  Top 0.305: 17.62,22.05 K.R6.1 | K.R6.1 | K.R6.1 K.R7.1 | K.R6.1 19.28,22.46 21.36,20.38 21.36,13.55 I.J1.3 21.36,10.96 21.36,9.19 20.11,7.95 JP6.1 19.84,7.43 K.C3.1
  Top 0.61: JP5.1 9.12,4.61 9.55,5.05 | K.C4.1 9.55,6.75 9.55,5.05 | K.U2.VCC 15.94,5.46 14.52,4.04 10.41,4.04 9.56,4.88 9.56,5.04 9.55,5.05 | K.U2.VCC 16.04,5.59 | K.U2.VCC 17.61,7.03 K.C3.1
VCC3  (via drill 0.35)
  Top 0.305: 60.07,6.25 v59.99,6.25 60.02,6.25 60.3,6.53 60.97,6.53 61.26,6.82 D.R4.1 61.43,6.87 D.C1.2 61.43,9.37 61.95,9.89 | 61.97,10.07 61.82,9.91
  Top 0.61: D.U3.5 60.26,10.72
  Top 0.813: D.J3.3 70.58,12.23 68.24,9.89 64.59,9.89 63.19,11.29 | D.C1.2 61.62,9.26 61.62,9.71 61.7,9.8 | 61.7,9.8 61.82,9.91 63.19,11.29 | D.U3.5 60.81,10.7 61.7,9.8 | v62.38,18.34 v62.38,17.27 62.38,16.84 63.19,16.03 63.19,11.29
  Bottom 0.305: D.T2.G 54.9,8.43 54.9,6.93 55.46,6.38 59.87,6.38 v59.99,6.25
  Bottom 0.356: v62.38,17.27 v62.38,17.26
  Bottom 0.61: D.L1.2 63.9,18.91 64.46,18.35 D.U2.BP | 63.43,19.93 D.L1.2 | D.C7.2 61.92,19.98 62.99,19.98 62.89,19.87 | D.L1.2 63.49,19.87 | 62.38,19.57 62.68,19.87
  Bottom 0.813: 62.68,19.87 62.89,19.87 63.49,19.87 | 62.38,17.33 | v62.38,17.27 62.38,17.33 | 62.38,17.33 62.38,19.57
VMOT  (via drill 0.35)
  Top 0.813: 68.22,13.24 D.F2.1 68.22,13.24 | 68.22,12.88 68.22,13.24 | v67.26,12.02 66.85,12.02 65.96,12.9 D.D2.K | v67.26,12.02 67.41,12.02 | 68.22,13.24 v68.22,12.07 68.17,12.02 v67.26,12.02
  Bottom 0.254: 68.72,13.54 68.36,13.54 D.F1.1
  Bottom 0.305: D.C2.2 68.83,16.74 69.34,16.23 69.34,14.16 68.72,13.54 | 66.32,12.53 D.R7.1 66.32,12.88 66.22,12.78
  Bottom 0.813: D.T1.S 63.08,15.6 63.08,14.89 63.31,14.66 63.31,12.27 63.84,11.73 65.53,11.73 66.22,12.42 66.22,12.78 | D.F1.1 68.21,13.23 68.21,12.02 v67.26,12.02 66.83,12.02 66.32,12.53
VUSB3  (via drill 0.35)
  Top 0.813: D.J3.1 70.3,17.01 66.86,17.01 66.29,16.44 D.D2.A 65.96,16.21 64.46,14.71 64.46,11.76 65.28,10.95 v67.81,10.95
  Bottom 0.305: 60.85,11.34 61.02,11.51 D.R6.2 60.57,12.17
  Bottom 0.508: 62.97,9.52 62.97,10.5 | 63,10.81 67.71,10.81
  Bottom 0.61: 61.08,15.83 D.T1.G 61.08,17.81 60.54,18.35 59.91,18.35 59.79,18.48 D.R8.2 59.61,18.63 58.44,18.63 58.21,18.86 58.21,19.37 U$4.4 | v67.81,10.95 67.86,10.95 | 62.97,10.81 62.97,10.76 | U$3.B4A9 62.97,10.5 62.97,10.76 | 62.97,10.76 63,10.81 | 67.71,10.81 67.86,10.64 67.87,10.63 U$3.A4B9
  Bottom 0.813: 67.86,10.95 67.86,10.64 | 62.97,10.81 62.82,10.96 61.48,10.96 61.33,11.11 | D.T1.G 61.01,15.63 61.01,14.89 60.69,14.58 60.69,11.85 60.64,11.8 61.33,11.11 | v67.81,10.95 | v67.81,10.95 v66.72,10.95 | 61.33,11.11 60.34,10.13 D.C4.2 60.85,10.66 60.85,11.34

## Text on the board
tPlace: + | − | power solar / M6 | sensor M.3 | sensor M.3
bPlace: GND | GND | GND | PA3 | PA3 | PA3 | PA6 | VUSB | PA6 | VUSB | PA6 | VUSB | PA7 | VBAT | PA7 | VBAT | PA7 | VBAT | SDA | 3V3 | SDA | 3V3 | SDA | 3V3 | SCL | GND | SCL | GND | SCL | GND | UPDI | UPDI | UPDI | adapter 414 / M.6 | adapter 414 / M.6 | adapter 414 / M.6 | GND | GND | GND | PA3 | PA3 | PA3 | PA6 | VUSB | PA6 | VUSB | PA6 | VUSB | PA7 | VBAT | PA7 | VBAT | PA7 | VBAT | SDA | 3V3 | SDA | 3V3 | SDA | 3V3 | SCL | GND | SCL | GND | SCL | GND | UPDI | UPDI | UPDI | adapter M.6 | adapter M.6 | adapter M.6
tNames: Hugo M6